# Altium PCB plc_module_xs.00001.001.PcbDoc (part 2 of 2)
Units mm, origin at the board's own origin, x right, y up, seen from the top; angles counter-clockwise.
Board outline 39 x 110 mm, 2 copper layers (Top Layer, Bottom Layer), stack 1.06 mm thick; 80 components, 57 nets, 253 pads, 58 vias.
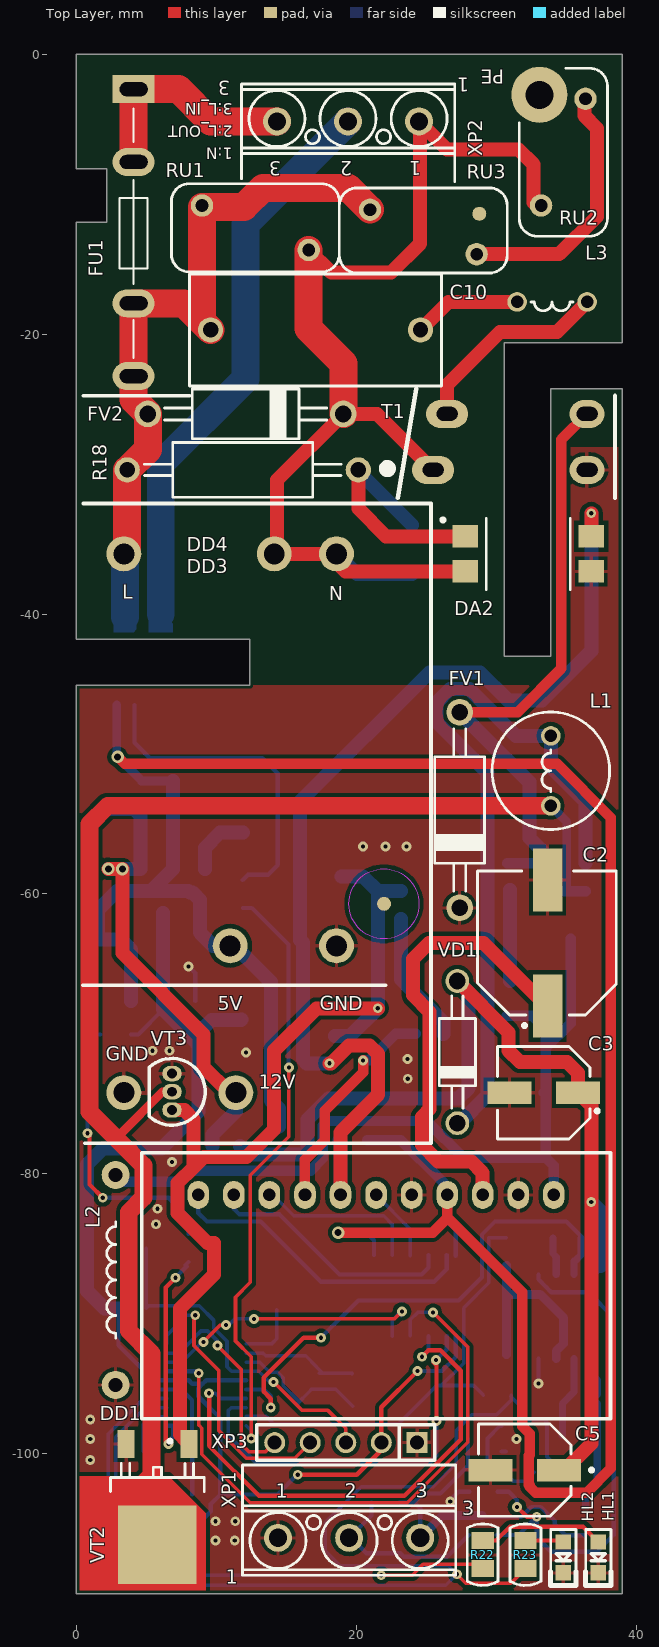
[diagram p0: Top Layer view]

## Polygon pours and split planes (outlines as drawn)
GND on Top Layer "AutoNaming" (solid, remove dead copper, pour order 2): 0,-111.1 41.059,-112.7 41.059,-28.1 32.459,-28.1 32.459,-45.083 -0.342,-45.083
GND on Bottom Layer "GND_L02_P-001" (solid, remove dead copper, pour order 1): -1.7,-112.7 41,-112.7 41,-28.1 32.4,-28.1 32.4,-43 -1.7,-43

## Keep-outs
Top Layer:
  region: 24.479,-60.7 cw(c21.979,-60.7) 21.979,-63.2 cw(c21.979,-60.7) 19.479,-60.7 cw(c21.979,-60.7) 21.979,-58.2 cw(c21.979,-60.7)
Bottom Layer:
  region: 13.901,-46.632 ccw(c16.401,-46.632) 16.401,-49.132 ccw(c16.401,-46.632) 18.901,-46.632 ccw(c16.401,-46.632) 16.401,-44.132 ccw(c16.401,-46.632)

## Other copper
Top Layer:
  region net NetC6_1: 0.259,-109.741 0.259,-101.6 6.612,-101.6 9.259,-104.246 9.259,-109.741
Bottom Layer:
  region net NetDD2_3: 5.2,-40.05 5.2,-41.3 6.9,-41.3 6.9,-40.695 6.705,-40.5
  region net NetC10_2: 2.7,-39.9 2.7,-41.3 4.1,-41.3 4.3,-41.1 4.3,-40.2

## Silkscreen, mask and mechanical layers (free items; w line width, h text height)
Top Overlay:
  lines w0.254: 34.301,-107.636 35.301,-107.636 ; 36.8,-107.65 37.8,-107.65 ; 34.301,-107.136 35.301,-107.136 34.801,-107.636 34.301,-107.136 ; 36.8,-107.15 37.8,-107.15 37.3,-107.65 36.8,-107.15
  text "PE" at 30.6,-1.1 h1 r180
  text "1" at 28.1,-1.7 h1 r180
  text "3" at 11,-1.9 h1 r180
  text "3:L_IN" at 11.2,-3.5 h0.8 r180
  text "2:L_OUT" at 11.2,-5.1 h0.8 r180
  text "1:N" at 11.2,-6.7 h0.8 r180
  text "3" at 27.59,-104.4 h1
  text "1" at 10.7,-109.3 h1
Bottom Overlay:
  text "L_IN" at 15.3,-1.9 h1
  text "L_OUT" at 21.65,-1.9 h1
  text "N" at 24.8,-1.9 h1
  text "PE" at 30.6,-2.1 h1
  text "3" at 14.6,-7.9 h1
  text "2" at 19.8,-7.9 h1
  text "1" at 24.5,-7.9 h1
  text "L" at 2.6,-33.65 h1
  text "N" at 14,-33.65 h1
  text "The Green Light / PLC_module_XS  / PWM/0-10V / Rev 1.2" at 18.916,-52.894 h1 r270
  text "12V" at 11.7,-72.3 h1
  text "GND" at 4.4,-77.1 h1
  text "VCC" at 22.954,-101.6 h0.8
  text "Gnd" at 25.884,-101.6 h0.8
  text "nR" at 19.054,-102.133 h0.8 r270
  text "DIO" at 13.754,-102.8 h0.8 r270
  text "CLK" at 16.354,-102.933 h0.8 r270
  text "GND" at 14.6,-108.672 h1
  text "10VPWR" at 22.2,-108.672 h1
  text "PWM/10V" at 31.2,-108.672 h1
1 - Board Outline:
  the board outline again, w0.5
Mechanical 4:
  text "https://www.aliexpress.com/store/product/ / 4-pieces-a-lot-small-plastic-electronics-enclosure-140 / -45-28mm-custom-electrical-box-instrument-case/ / 505449_1851042419.html" at -22.7,29.3 h2
7 - Designators (Top):
  lines w0.254: 14.3,-78.6 16.1,-78.6 ; 25.8,-78.6 27.6,-78.6
  text "XP3 -- DO NOT PLACE!" at -21.9,-99.841 h1
8 - Designators (Bottom):
  text "DO NOT PLACE" at -1.6,-40.4 h1

## Dimensions
30.6,-43 to 33.9,-43 on 12 - Dementions (Bottom)
4.1,-2.5 to 4.1,-23 on Mechanical 4
4.1,-17.8 to 4.1,-23 on Mechanical 4
4.1,-2.5 to 4.1,-7.7 on Mechanical 4
15.152,-4.104 to 15.232,-106.104 on Mechanical 4
-1.5,-110 to 19.5,-106 on Mechanical 4
0,-5 to 19.42,-4 on Mechanical 4
39,0 to 39,-110 on Mechanical 4
0,-12 to 39,-5 on Mechanical 4

## Panel: embedded boards
"plc_module_xs.00001.001.PcbDoc" at 166.3,-97.7, 1 rows x 1 columns, spacing 0 x 0, rotation 0

## Text inside footprints (layer, text, board x,y; h text height)
DD3: Top Overlay "L" at 3.3,-38.9 h1; Top Overlay "12V" at 13.042,-73.925 h1; Top Overlay "GND" at 2.1,-71.9 h1
DD4: Top Overlay "GND" at 17.4,-68.3 h1; Top Overlay "N" at 19.085,-38.004 h1 r180; Top Overlay "5V" at 10.1,-68.3 h1
XP1: Top Overlay "1" at 14.261,-103.142 h1; Top Overlay "2" at 19.183,-103.142 h1; Top Overlay "3" at 24.263,-103.142 h1; 14 - 3D Body (Bottom) "1" at 14.261,-103.142 h1; 14 - 3D Body (Bottom) "2" at 19.183,-103.142 h1; 14 - 3D Body (Bottom) "3" at 24.263,-103.142 h1
XP2: Top Overlay "1" at 24.659,-7.657 h1 r180; Top Overlay "2" at 19.738,-7.657 h1 r180; Top Overlay "3" at 14.658,-7.657 h1 r180; 14 - 3D Body (Bottom) "1" at 24.659,-7.657 h1 r180; 14 - 3D Body (Bottom) "2" at 19.738,-7.657 h1 r180; 14 - 3D Body (Bottom) "3" at 14.658,-7.657 h1 r180